# Altium PCB PCB.PcbDoc
Units mm, origin at the board's own origin, x right, y up, seen from the top; angles counter-clockwise.
Board outline 84 x 100 mm, 4 copper layers (Top Layer, Layer2, Layer3, Bottom Layer), stack 1.552 mm thick; 28 components, 24 nets, 161 pads, 1856 vias.
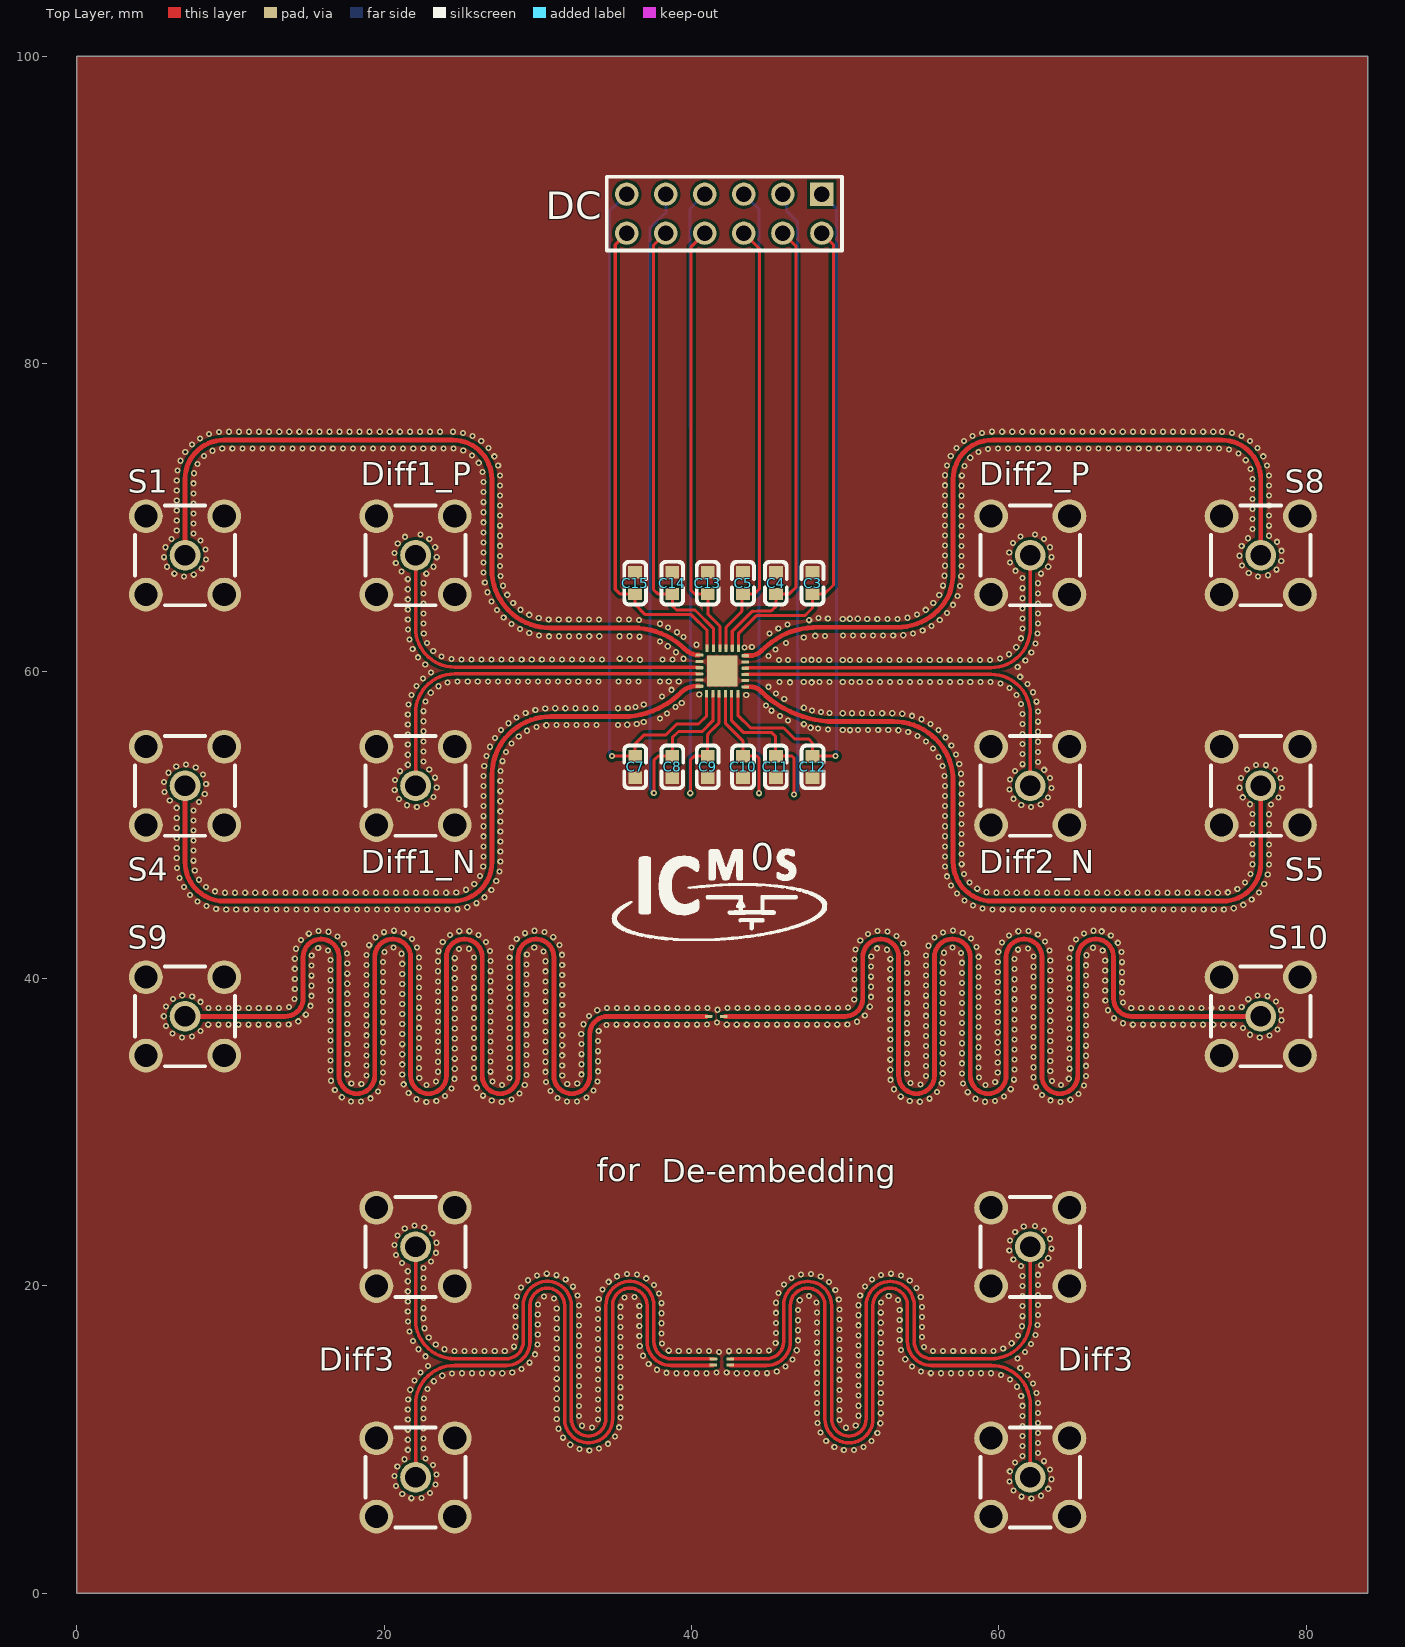
[diagram p0: Top Layer view]
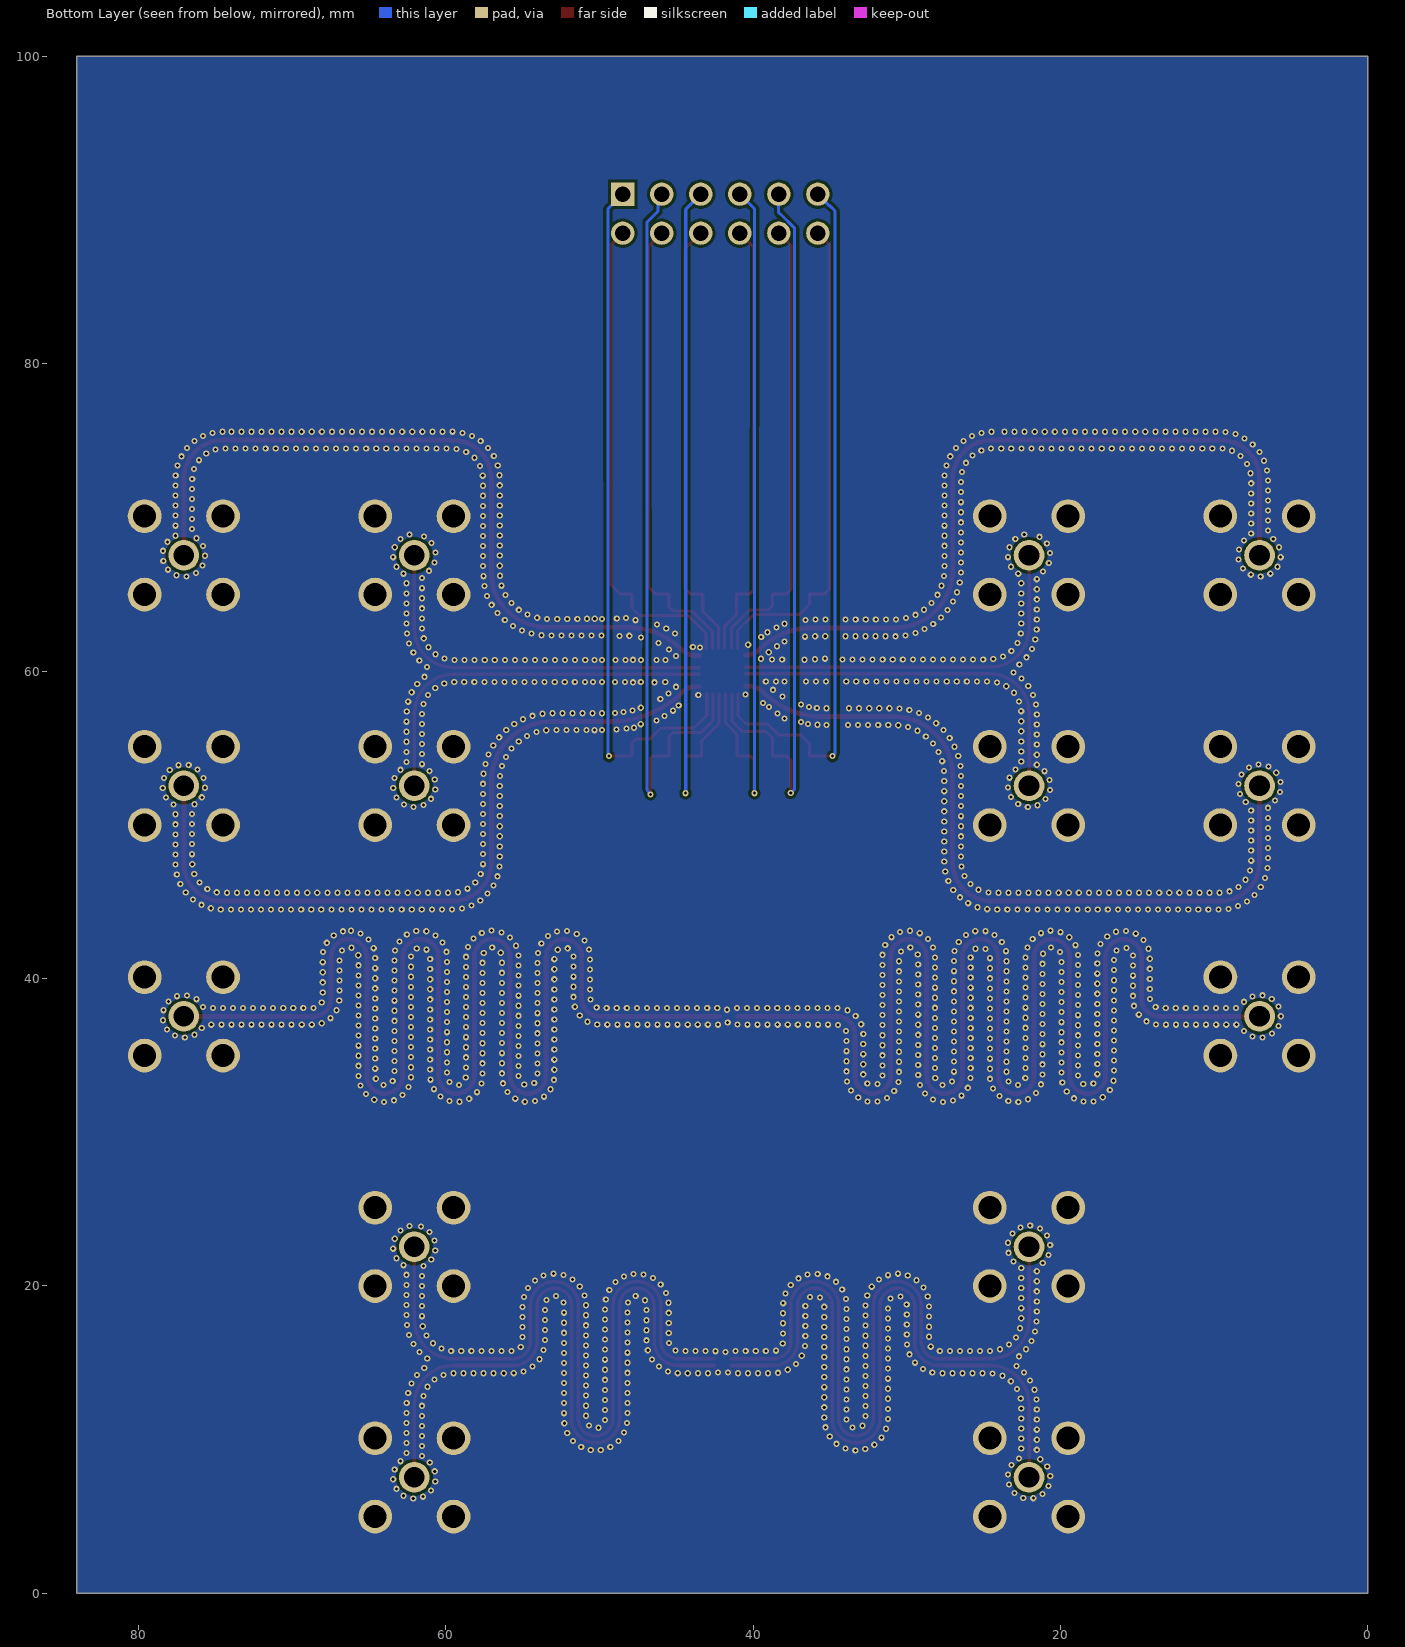
[diagram p1: Bottom Layer view, seen from below]
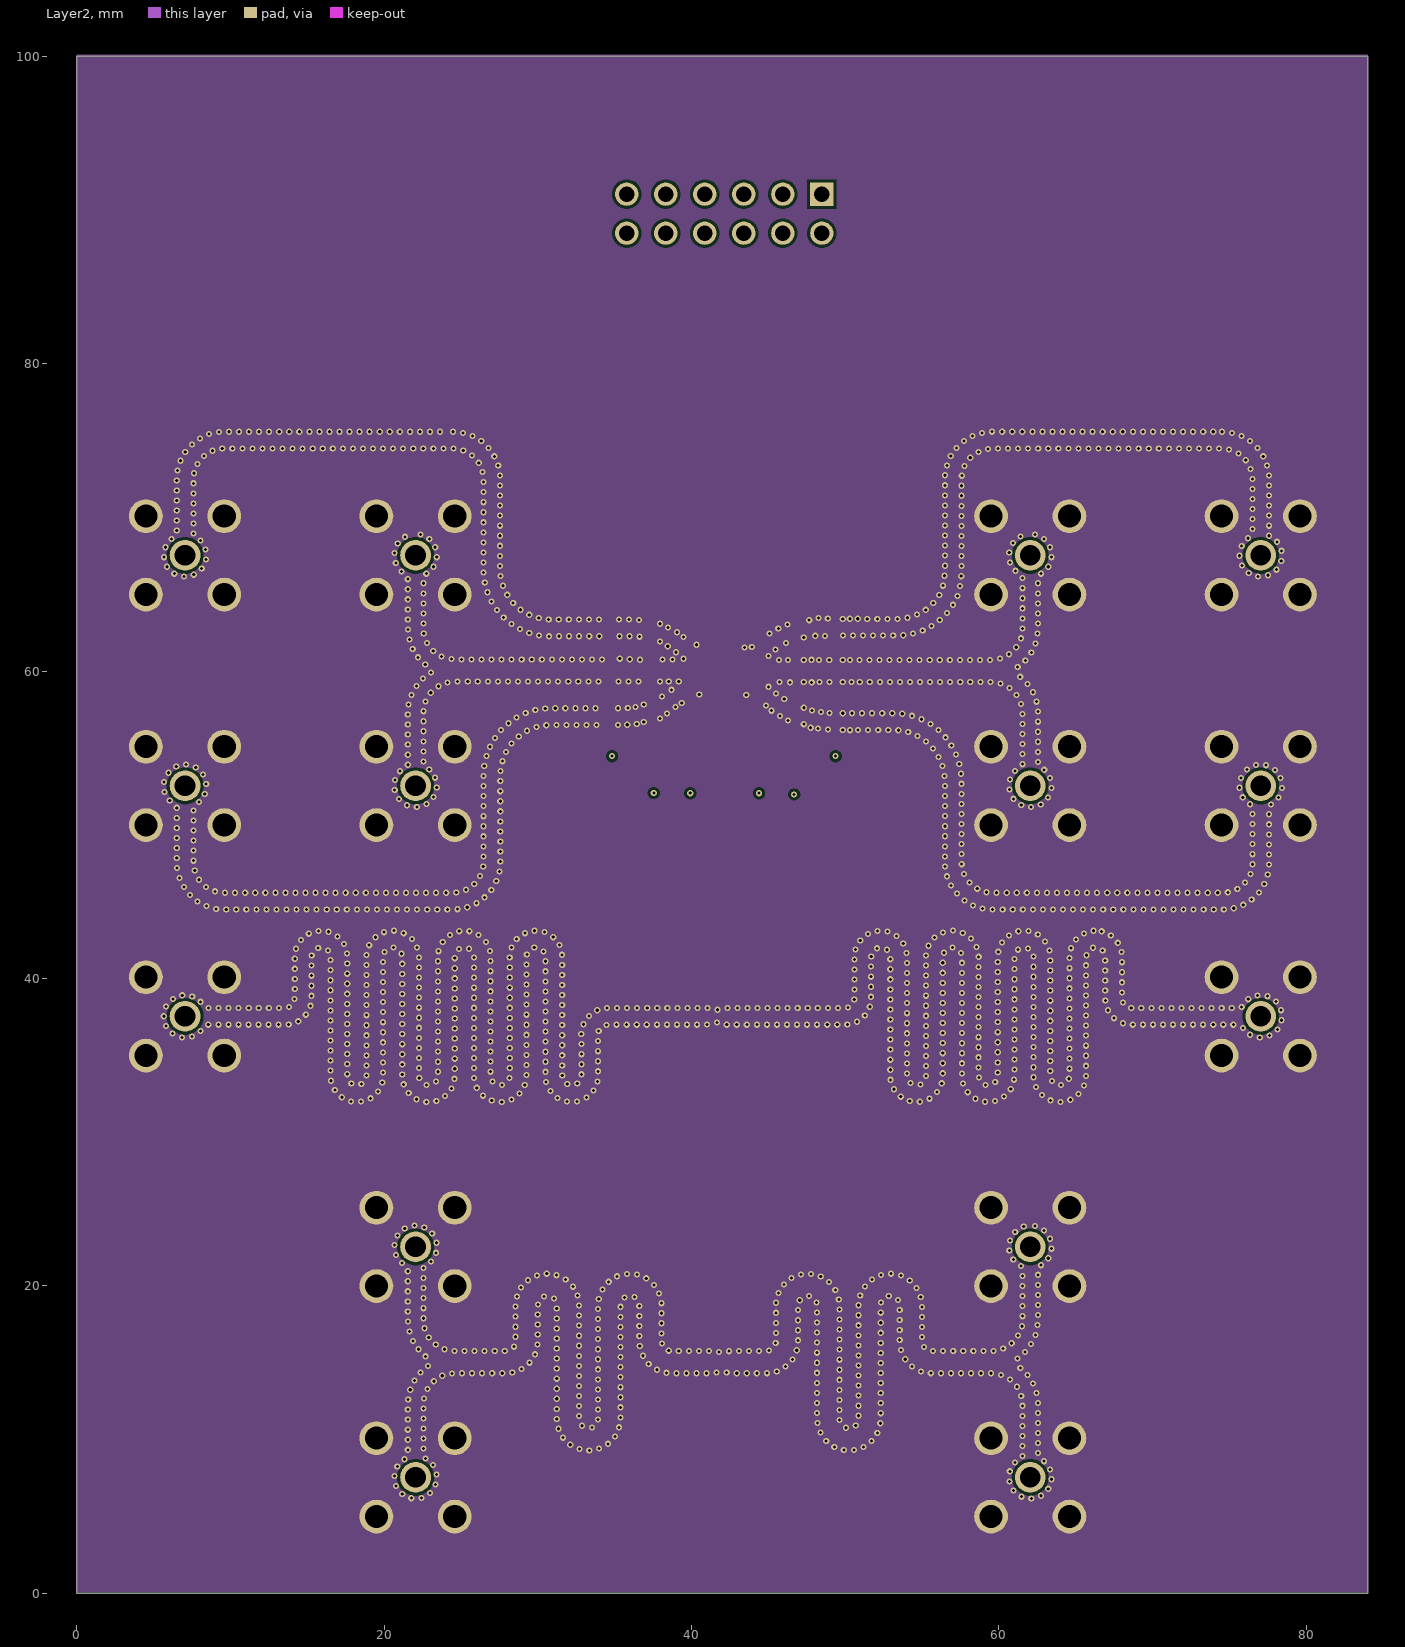
[diagram p2: Layer2]
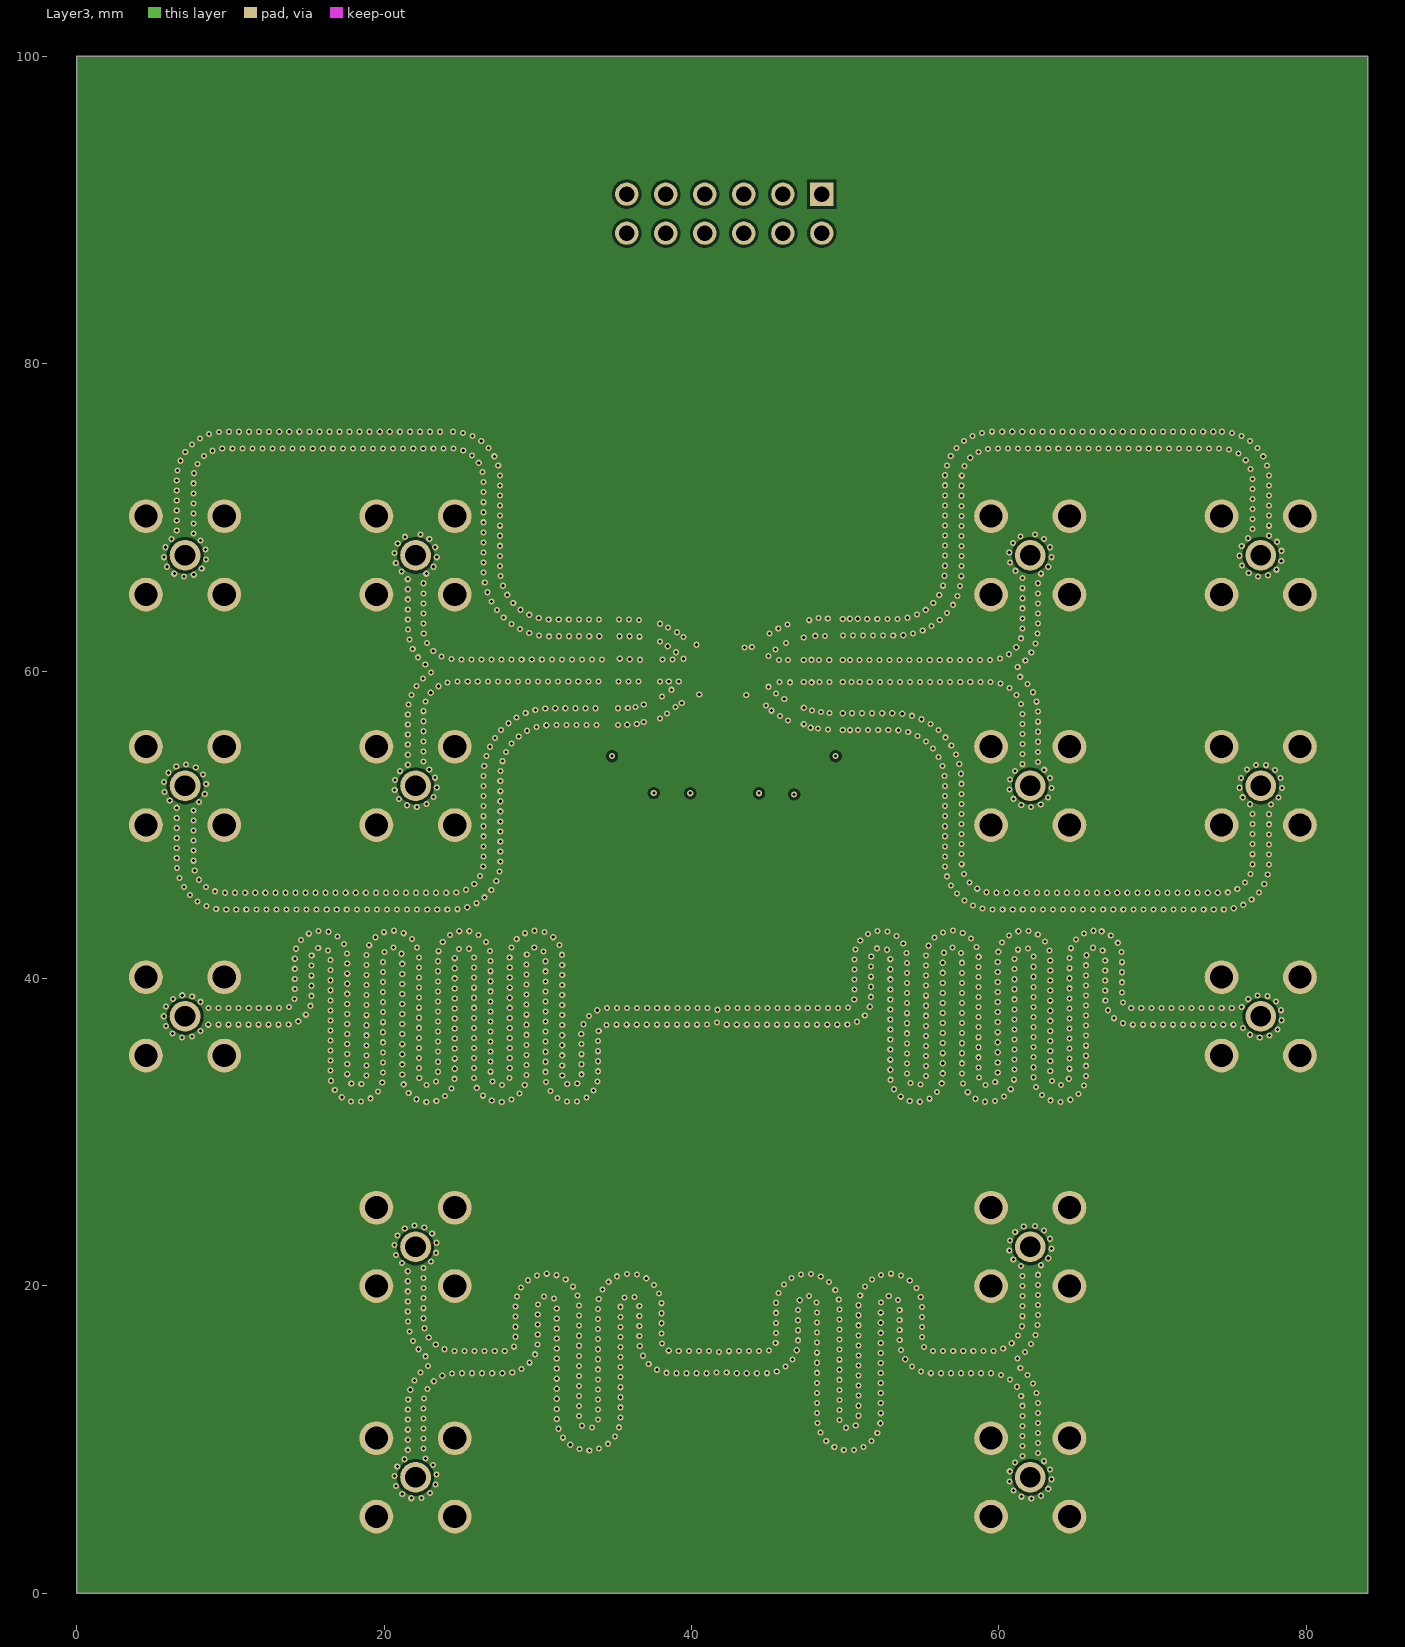
[diagram p3: Layer3]

## Layer stack, top to bottom
Top Solder: solder mask 0.035, Solder Resist, Dk 3.5
Top Layer: signal copper 0.035
Dielectric 2: prepreg 0.168, PP-006, Dk 4.1
Layer2: signal copper 0.018
Dielectric 1: dielectric 1.11, FR-4, Dk 4.8
Layer3: signal copper 0.018
Dielectric 3: prepreg 0.168, PP-006, Dk 4.1
Bottom Layer: signal copper 0.035
Bottom Solder: solder mask 0.035, Solder Resist, Dk 3.5

## Board outline
0,0 0,100 84,100 84,0

## Design rules (kind name [scope] priority, off if disabled: settings)
Clearance GND [InPolygon] p1: gap=0.185 ignorepadtopadclearanceinfootprint=FALSE
Clearance [All] p2: gap=0.1 ignorepadtopadclearanceinfootprint=FALSE
DiffPairsRouting [InDifferentialPairClass('All Differential Pairs')] p1: maxlimit=100 minlimit=0.21 mostfreqgap=0.21 toplayer_minwidth=0.01 toplayer_maxwidth=0.23 toplayer_prefwidth=0.23 midlayer1_minwidth=0.01 midlayer1_maxwidth=0.23 midlayer1_prefwidth=0.23 midlayer2_minwidth=0.01 midlayer2_maxwidth=0.23 midlayer2_prefwidth=0.23 bottomlayer_minwidth=0.01 bottomlayer_maxwidth=0.23 bottomlayer_prefwidth=0.23 maxuncoupledlength=12.7
MinimumSolderMaskSliver [All] p1: minsoldermaskwidth=0.1
PolygonConnect [InNet('GND')] p1: connectstyle=Direct reliefconductorwidth=0.254 reliefentries=4 polygonreliefangle="90 Angle" airgapwidth=0.254
RoutingVias [All] p1: holewidth=0.2 width=0.4 viastyle="Through Hole" minholewidth=0.2 minwidth=0.4 maxholewidth=0.6 maxwidth=1.2
SilkToSolderMaskClearance [IsPad] p1: minsilkscreentomaskgap=0.1 clearancetoexposedcopper=TRUE
SolderMaskExpansion [All] p1: expansion=0.102 istentingtop=FALSE
SupplyNets "Schematic Supply Nets" [InNet('GND')] p1: voltage=0.000
Width RF [InNetClass('RF')] p1: maxlimit=0.315 minlimit=0.001 preferedwidth=0.315
Width [All] p2: maxlimit=0.315 minlimit=0.001 preferedwidth=0.315
27 further rules are at their usual default settings.

## Classes and differential pairs
net class RF: NetS9_5 RF1 RF2 RF3 RF4
component class sheet1: C3 C4 C5 C7 C8 C9 C10 C11 C12 C13 C14 C15 Diff1_N Diff1_P S1 S4 S5 S8 S9 S10 U1
differential pair RF3: +RF3_P -RF3_N
differential pair RF2: +RF2_P -RF2_N
differential pair RF1: +RF1_P -RF1_N

## Components (designator, comment, footprint, x,y, rotation, side; value= is the part's Value field where it differs from the comment)
C3 "C0603" C0603 47.876,65.733 r90 top
C4 "C0603" C0603 45.484,65.733 r90 top
C5 "C0603" C0603 43.353,65.733 r90 top
C7 "C0603" C0603 36.33,53.773 r90 top
C8 "C0603" C0603 38.746,53.773 r90 top
C9 "C0603" C0603 41.049,53.773 r90 top
C10 "C0603" C0603 43.353,53.773 r90 top
C11 "C0603" C0603 45.484,53.773 r90 top
C12 "C0603" C0603 47.876,53.773 r90 top
C13 "C0603" C0603 41.049,65.713 r270 top
C14 "C0603" C0603 38.746,65.713 r270 top
C15 "C0603" C0603 36.33,65.713 r270 top
De-embedding "BWSMA" BWSMA#1 62.04,7.533 r0 top (schematic designator S14)
Diff1_N "BWSMA" BWSMA#1 22.04,52.533 r0 top (schematic designator S3)
Diff1_P "BWSMA" BWSMA#1 22.04,67.533 r0 top (schematic designator S2)
Diff2_N "BWSMA" BWSMA#1 62.04,52.533 r0 top (schematic designator S6)
Diff2_P "BWSMA" BWSMA#1 62.04,67.533 r0 top (schematic designator S7)
Diff3 "BWSMA" BWSMA#1 62.04,22.533 r0 top (schematic designator S12)
Diff3 "BWSMA" BWSMA#1 22.04,22.533 r0 top (schematic designator S11)
for "BWSMA" BWSMA#1 22.04,7.533 r0 top (schematic designator S13)
S1 "BWSMA" BWSMA#1 7.04,67.533 r0 top
S4 "BWSMA" BWSMA#1 7.04,52.533 r0 top
S5 "BWSMA" BWSMA#1 77.04,52.533 r0 top
S8 "BWSMA" BWSMA#2 77.04,67.533 r0 top
S9 "BWSMA" BWSMA#1 7.04,37.533 r0 top
S10 "BWSMA" BWSMA#1 77.04,37.533 r0 top
U1 "2mm_24p" 2MM_8AC_16DC 45.043,60.004 r0 top
U2 "HX PZ2.54-2x6P ZZ" 2*6 42.547,89.713 r180 top

## Footprints (in the part's own frame and the unit in brackets; to place one, negate y for a bottom-side part, rotate by r counter-clockwise, add the part's x,y. Pads: shape width x height; smd on the part's side, far side on the other; paste and mask are expansions set on the pad)
2*6 [mm]
  rect 1.52x1.52 hole 1.02 paste-2539.97 mask+0.05: 1(-5.933,-1.327)
  round 1.52 hole 1.02 paste-2539.97 mask+0.05: 2(-5.933,1.213) 3(-3.393,-1.327) 4(-3.393,1.213) 5(-0.853,-1.327) 6(-0.853,1.213) 7(1.687,-1.327) 8(1.687,1.213) 9(4.227,-1.327) 10(4.227,1.213) 11(6.767,-1.327) 12(6.767,1.213)
  silkscreen extent -7.23,-2.46 8.07,2.34, body extent -7.2,-5.5 8.12,5.46, height 10.54
2MM_8AC_16DC [mm]
  rrect50% 0.5x0.2 smd mask+0.05: 1(-4.53,1.03) 2(-4.53,0.614) 3(-4.53,0.214) 4(-4.53,-0.186) 5(-4.53,-0.586) 6(-4.53,-0.99) 13(-1.539,-1.029) 14(-1.543,-0.618) 15(-1.543,-0.218) 16(-1.543,0.182) 17(-1.543,0.583) 18(-1.543,0.995)
  rect 0.1x0.05 on Mech16 mask+0.102: 1(-3.935,0.706) 2(-3.933,0.406) 3(-3.933,0.056) 4(-3.933,-0.044) 5(-3.933,-0.394) 6(-3.933,-0.694) 13(-2.133,-0.694) 14(-2.133,-0.394) 15(-2.133,-0.044) 16(-2.133,0.056) 17(-2.133,0.406) 18(-2.133,0.706)
  rrect50% 0.2x0.5 smd mask+0.05: 7(-4.062,-1.475) 8(-3.661,-1.475) 9(-3.256,-1.475) 10(-2.842,-1.475) 11(-2.431,-1.475) 12(-2.029,-1.475) 19(-1.996,1.483) 20(-2.396,1.483) 21(-2.796,1.483) 22(-3.196,1.483) 23(-3.628,1.483) 24(-4.032,1.483)
  rect 0.05x0.1 on Mech16 mask+0.102: 7(-3.733,-0.894) 8(-3.433,-0.894) 9(-3.083,-0.894) 10(-2.983,-0.894) 11(-2.633,-0.894) 12(-2.333,-0.894) 19(-2.333,0.906) 20(-2.633,0.906) 21(-2.983,0.906) 22(-3.083,0.906) 23(-3.433,0.906) 24(-3.733,0.906)
  rect 2x2 smd mask+0.05: 25(-3.049,0)
  body extent -4.03,-0.99 -2.03,1.01, height 0.05
BWSMA#1 [mm]
  round 2.2 hole 1.5 paste-2539.97 mask+0.051: 1(-2.55,-2.55) 2(-2.55,2.55) 3(2.55,2.55)
  round 2.2 hole 1.5 copper offset 0,0 paste-2539.97 mask+0.051: 4(2.55,-2.55)
  round 2 hole 1.35 paste-2539.97 mask+0.051: 5(0,0)
  silkscreen extent -3.25,-3.25 3.25,3.25, body extent -2.54,-2.5 2.46,2.5, height 8
BWSMA#2 [mm]
  round 2.2 hole 1.5 paste-2539.97 mask+0.051: 1(-2.55,-2.55) 2(-2.55,2.55) 3(2.55,2.55)
  round 2.2 hole 1.5 copper offset 0,0 paste-2539.97 mask+0.051: 4(2.55,-2.55)
  round 2 hole 1.35 paste-2539.97 mask+0.102: 5(0,0)
  silkscreen extent -3.25,-3.25 3.25,3.25, body extent -2.54,-2.5 2.46,2.5, height 8
C0603 [mm]
  rect 0.8x0.9 smd: 1(-0.71,0) 2(0.69,0)
  silkscreen extent -1.4,-0.71 1.38,0.71, body extent -0.82,-0.4 0.78,0.4, height 0.5

## Part data
U2: Color=Black, Current Rating=3A, JLCPCB Part Class="Extended Part", LCSC Part Name="2x6P 间距:2.54mm 方针 直插", Manufacturer=hanxia(韩下), Operating Temperature=-40℃~+105℃, Voltage Rating (Max)=-, Add into BOM=yes, Circluar Pins/Square Pins=Policy, Contact Material=Brass, Contact Plating=Gold, Convert to PCB=yes, Datasheet=https://atta.szlcsc.com/upload/public/pdf/source/20240723/7CFD6BBE81D942E4FB6053E60626E655.pdf, Device="HX PZ2.54-2x6P ZZ", Insulation Height=2.5mm, Length of End Connection Pin=3mm, Length of Mating Pin=6mm, Manufacturer Part="HX PZ2.54-2x6P ZZ", Mounting Type=Straight, Number of Pins=12P, Number of Rows="Double Row", Pin Structure=2x6P, Pitch=2.54mm, Row Spacing=2.54mm, Supplier=LCSC, Supplier Footprint=插件,P=2.54mm, Supplier Part=C32713279, Symbol="HX PZ2.54-2X6P ZZ"

## Free pads (board coordinates)
  rrect50% 0.5x0.2 smd mask+0.05: 2(41.111,37.531) 3(42.089,37.535) 4(41.422,15.241) 4(42.508,15.238) 4(42.519,14.838) 5(41.407,14.838)

## Via types
v1: diameter 0.4, hole 0.2, Top Layer to Bottom Layer, tented both sides, 1856 vias

## Nets (pads, with @x,y where several pads share a name; then routed paths per layer and width w, separated by ;. In a path a pad name is that pad's centre, name@x,y a point inside that pad or via, vN(x,y) a via of type N, cw(c..) or ccw(c..) an arc to the next point about the centre after c; other vN are vias at no path point)
DC3: C7.2 U1.7 U2.11 | length 46.3
  Top Layer w0.2: v1@34.825,54.464 C7.2 36.33,55.27 36.914,55.854 38.334,55.854 39.034,56.554 40.454,56.554 40.981,57.081 U1.7@40.981,58.529
  Bottom Layer w0.2: v1(34.824,54.464) 34.718,54.571 cw(c34.859,54.712) 34.659,54.712 34.659,89.859 cw(c34.859,89.859) 34.718,90 35.008,90.29 35.03,90.29 U2.11
DC4: C8.2 U1.8 U2.9 | length 49
  Top Layer w0.2: v1(37.544,52.064) 37.544,54.194 37.814,54.464 C8.2 38.746,55.676 39.144,56.074 40.694,56.074 41.382,56.762 U1.8@41.382,58.529
  Bottom Layer w0.2: v1(37.544,52.064) 37.348,52.26 cw(c37.489,52.402) 37.289,52.402 37.289,88.744 cw(c37.489,88.744) 37.348,88.886 38.176,89.714 38.217,89.714 38.334,89.831 38.334,91.026 U2.9
DC5: C9.2 U1.9 U2.7 | length 47.1
  Top Layer w0.2: v1(39.914,52.054) 39.924,52.064 39.924,54.214 40.174,54.464 C9.2 41.049,55.806 cw(c41.249,55.806) 41.108,55.947 41.729,56.568 ccw(c41.587,56.709) 41.787,56.709 U1.9@41.787,58.529
  Bottom Layer w0.2: v1(39.914,52.054) 39.914,56.11 cw(c40.114,56.11) 39.915,56.132 39.916,56.143 ccw(c39.718,56.166) 39.918,56.166 39.918,60.708 ccw(c39.718,60.708) 39.914,60.746 39.914,61.875 cw(c40.114,61.875) 39.914,61.887 39.917,61.937 ccw(c39.718,61.949) 39.918,61.948 39.918,75.811 ccw(c39.718,75.811) 39.9,75.892 39.9,90.08 U2.7
DC6: C10.2 U1.10 U2.5 | length 47.3
  Top Layer w0.2: U1.10@42.201,58.529 42.201,56.68 ccw(c42.401,56.68) 42.259,56.539 43.295,55.503 cw(c43.153,55.362) 43.353,55.362 C10.2 44.255,54.463 44.394,54.324 v1(44.394,52.054)
  Bottom Layer w0.2: U2.5 44.32,90.12 cw(c44.178,89.979) 44.378,89.979 44.378,52.13 ccw(c44.578,52.131) v1(44.394,52.054)
DC7: C11.2 U1.11 U2.3 | length 49.5
  Top Layer w0.2: U1.11@42.611,58.529 42.611,56.777 43.394,55.994 45.224,55.994 45.474,55.744 45.474,54.474 C11.2 46.535,54.463 46.674,54.324 v1(46.674,51.974)
  Bottom Layer w0.2: U2.3 46.184,90.796 46.184,89.934 46.9,89.218 46.9,70.595 ccw(c47.091,70.537) 46.891,70.539 46.909,52.429 cw(c46.383,52.428) 46.755,52.056 v1(46.674,51.974)
DC8: C12.2 U1.12 U2.1 | length 46.4
  Top Layer w0.2: U1.12@43.014,58.529 43.014,57.124 43.844,56.294 45.994,56.294 46.694,55.594 47.604,55.594 47.876,55.322 C12.2 v1(49.374,54.464) v1@49.384,54.454
  Bottom Layer w0.2: U2.1 49.44,90.08 49.44,72.351 ccw(c49.638,72.324) 49.438,72.325 49.438,54.611 cw(c49.238,54.611) 49.38,54.47 v1(49.374,54.464)
DC11: C3.1 U1.19 U2.2 | length 32.2
  Top Layer w0.2: U1.19@43.047,61.487 43.047,62.426 44.186,63.565 cw(c44.327,63.424) 44.327,63.624 47.311,63.624 ccw(c47.311,63.824) 47.453,63.682 47.876,64.105 C3.1 48.653,65.023 49.234,65.604 49.234,87.746 U2.2
DC12: C4.1 U1.20 U2.4 | length 30.3
  Top Layer w0.2: U1.20@42.647,61.487 42.647,62.596 43.886,63.835 cw(c44.027,63.694) 44.005,63.892 44.274,63.921 cw(c44.327,63.424) 44.327,63.924 45.131,63.924 ccw(c45.131,64.124) 45.273,63.982 45.484,64.194 C4.1 46.363,65.023 46.794,65.454 46.794,87.646 U2.4
DC13: C5.1 U1.21 U2.6 | length 28.8
  Top Layer w0.2: U1.21@42.247,61.487 42.247,62.784 cw(c42.447,62.784) 42.305,62.925 43.216,63.836 ccw(c43.074,63.977) 43.274,63.977 43.274,64.944 C5.1 44.093,65.023 44.424,65.354 44.424,87.476 U2.6
DC14: C13.2 U1.22 U2.8 | length 28.7
  Top Layer w0.2: U2.8 39.977,87.617 39.977,65.241 40.195,65.023 C13.2 41.064,65.009 41.064,63.694 41.847,62.911 U1.22@41.847,61.487
DC15: C14.2 U1.23 U2.10 | length 30.2
  Top Layer w0.2: U2.10 37.524,87.704 37.524,65.304 37.805,65.023 C14.2 38.746,64.242 39.014,63.974 40.224,63.974 41.415,62.783 U1.23@41.415,61.487
DC16: C15.2 U1.24 U2.12 | length 32.1
  Top Layer w0.2: U2.12 35.78,88.493 35.034,87.747 35.034,65.324 35.335,65.023 C15.2 ; C15.2 36.33,64.333 36.989,63.674 39.974,63.674 41.011,62.637 U1.24@41.011,61.487
GND: C3.2 C4.2 C5.2 C7.1 C8.1 C9.1 C10.1 C11.1 C12.1 C13.1 C14.1 C15.1 De-embedding.1 De-embedding.2 De-embedding.3 De-embedding.4 Diff1_N.1 Diff1_N.2 Diff1_N.3 Diff1_N.4 Diff1_P.1 Diff1_P.2 Diff1_P.3 Diff1_P.4 Diff2_N.1 Diff2_N.2 Diff2_N.3 Diff2_N.4 Diff2_P.1 Diff2_P.2 Diff2_P.3 Diff2_P.4 Diff3.1 Diff3.2 Diff3.3 Diff3.4 for.1 for.2 for.3 for.4 S1.1 S1.2 S1.3 S1.4 S4.1 S4.2 S4.3 S4.4 S5.1 S5.2 S5.3 S5.4 S8.1 S8.2 S8.3 S8.4 S9.1 S9.2 S9.3 S9.4 S10.1 S10.2 S10.3 S10.4 U1.2 U1.5 U1.14 U1.17 U1.25
  other v1: 62.11,6.149 21.762,6.176 22.415,6.2 61.468,6.274 62.736,6.337 21.172,6.458 22.986,6.519 60.954,6.679 63.209,6.788 20.775,6.977 23.342,7.068 60.681,7.273 63.417,7.409 20.658,7.621 23.408,7.718 60.71,7.926 63.318,8.055 20.852,8.245 23.171,8.328 61.039,8.491 62.936,8.586 21.31,8.712 22.682,8.762 61.534,8.919 62.545,9.11 33.345,9.279 21.534,9.327 49.907,9.307 50.561,9.306 32.698,9.373 22.545,9.401 33.988,9.402 49.288,9.518 51.182,9.512 61.534,9.573 32.108,9.655 34.561,9.718 62.545,9.764 48.76,9.904 51.711,9.896 21.534,9.981 22.545,10.055 31.642,10.113 35.008,10.194 61.534,10.227 62.545,10.418 48.388,10.442 52.088,10.43 21.534,10.635 31.341,10.694 22.545,10.709 33.516,10.77 50.046,10.76 35.28,10.789 32.874,10.894 61.534,10.881 50.683,10.911 52.282,11.055 48.199,11.068 62.545,11.072 49.632,11.266 21.534,11.289 33.909,11.294 31.228,11.338 22.545,11.363 35.365,11.438 32.679,11.518 61.534,11.535 50.858,11.541 52.31,11.708 48.172,11.722 62.545,11.726 49.624,11.92 21.534,11.943 33.913,11.948 31.227,11.992 22.545,12.017 35.365,12.092 32.679,12.172 50.858,12.195 61.534,12.189 48.172,12.376 52.31,12.362 62.537,12.38 49.624,12.574 21.559,12.596 33.913,12.602 31.227,12.646 22.578,12.671 35.365,12.746 32.679,12.826 50.858,12.849 61.45,12.838 48.172,13.03 52.31,13.016 62.441,13.027 21.693,13.236 49.624,13.228 33.913,13.256 22.815,13.28 31.227,13.3 35.365,13.4 61.176,13.432 32.679,13.48 50.858,13.503 62.216,13.641 52.31,13.67 48.172,13.684 23.226,13.789 21.972,13.828 49.624,13.882 60.719,13.899 33.913,13.91 31.227,13.954 35.365,14.054 23.774,14.145 32.679,14.134 50.858,14.157 60.139,14.201 61.857,14.188 24.411,14.297 25.064,14.307 25.718,14.307 26.372,14.307 27.026,14.307 27.68,14.307 39.018,14.307 39.672,14.307 40.326,14.307 40.98,14.307 42.938,14.307 43.592,14.307 44.246,14.307 56.223,14.307 56.877,14.307 57.531,14.307 58.185,14.307 58.839,14.307 59.493,14.307 44.9,14.311 52.31,14.324 55.569,14.311 22.363,14.352 28.333,14.354 38.365,14.336 41.632,14.358 42.286,14.359 48.172,14.338 45.544,14.428 54.927,14.432 37.742,14.536 49.624,14.536 28.944,14.586 33.913,14.564 31.227,14.608 61.393,14.649 35.365,14.708 46.12,14.738 54.353,14.746 22.858,14.779 32.679,14.788 50.858,14.811 37.211,14.917 48.172,14.992 52.31,14.978 29.455,14.995 49.624,15.19 33.913,15.218 46.573,15.21 53.904,15.221 31.227,15.262 61.2,15.274 35.365,15.362 22.692,15.412 32.679,15.442 36.829,15.448 50.858,15.465 29.813,15.542 48.172,15.646 52.31,15.632 41.781,15.692 61.701,15.695 42.433,15.744 24.575,15.758 25.229,15.759 25.883,15.759 26.537,15.759 27.191,15.759 27.845,15.759 38.514,15.777 39.168,15.759 39.822,15.759 40.476,15.759 41.13,15.759 43.086,15.759 43.74,15.759 44.394,15.759 55.717,15.759 56.371,15.759 57.025,15.759 57.679,15.759 58.333,15.759 58.987,15.759 59.641,15.766 45.048,15.785 46.847,15.803 53.631,15.815 49.624,15.844 22.227,15.872 23.93,15.867 33.913,15.872 60.28,15.907 31.227,15.916 28.437,16.036 35.365,16.016 55.116,16.015 36.629,16.07 32.679,16.096 50.858,16.119 23.352,16.173 29.974,16.176 62.095,16.216 38.065,16.252 60.832,16.258 45.476,16.28 52.31,16.286 48.172,16.3 21.868,16.418 46.938,16.451 53.544,16.464 49.624,16.498 33.913,16.526 31.227,16.57 22.896,16.642 35.365,16.67 54.996,16.658 28.541,16.682 36.599,16.724 32.679,16.75 50.858,16.773 61.251,16.76 62.377,16.806 29.993,16.83 38.051,16.906 45.486,16.934 52.31,16.94 48.172,16.954 21.64,17.031 46.938,17.105 53.544,17.118 49.624,17.152 33.913,17.18 31.227,17.224 22.626,17.237 35.365,17.324 54.996,17.312 28.541,17.336 36.599,17.378 61.493,17.368 32.679,17.404 50.858,17.427 62.518,17.445 29.993,17.484 38.051,17.56 45.486,17.588 48.172,17.608 52.31,17.594 21.543,17.678 46.938,17.759 53.544,17.772 49.624,17.806 33.913,17.834 22.545,17.887 31.227,17.878 54.996,17.966 28.541,17.99 35.365,17.978 36.599,18.032 61.534,18.021 32.679,18.058 50.858,18.081 62.545,18.098 29.993,18.138 38.051,18.214 45.486,18.242 48.172,18.262 52.31,18.248 21.534,18.332 46.938,18.413 53.544,18.426 49.624,18.46 33.913,18.488 22.545,18.541 31.227,18.532 54.996,18.62 28.541,18.644 35.365,18.632 61.534,18.675 36.599,18.686 32.679,18.712 50.861,18.735 62.545,18.752 30,18.792 38.037,18.868 45.503,18.896 52.337,18.902 48.14,18.915 21.534,18.986 47.04,19.059 53.434,19.07 49.581,19.112 33.961,19.14 31.046,19.161 22.545,19.195 35.633,19.228 36.286,19.26 54.913,19.269 28.631,19.292 30.408,19.303 47.635,19.33 52.833,19.329 61.534,19.329 32.569,19.357 50.974,19.379 62.545,19.406 37.89,19.505 45.656,19.531 21.534,19.64 49.354,19.726 34.197,19.75 22.545,19.849 54.644,19.865 28.905,19.885 32.274,19.94 51.278,19.958 61.534,19.983 37.547,20.061 62.545,20.06 46.008,20.083 48.95,20.241 34.608,20.258 21.534,20.294 54.198,20.343 29.357,20.358 31.81,20.401 51.745,20.416 22.545,20.503 37.049,20.486 46.512,20.499 48.406,20.602 35.156,20.615 61.534,20.637 29.933,20.668 53.626,20.662 31.222,20.688 52.337,20.695 36.444,20.734 62.545,20.714 47.12,20.741 35.791,20.772 47.773,20.77 52.984,20.785 30.576,20.787 21.534,20.948 22.545,21.157 61.444,21.284 62.74,21.339 21.148,21.476 23.045,21.578 60.938,21.699 63.212,21.791 20.763,22.004 23.37,22.146 60.677,22.299 63.417,22.412 20.662,22.651 23.398,22.799 60.718,22.952 63.317,23.059 20.866,23.272 23.121,23.392 61.059,23.509 62.933,23.588 21.337,23.725 22.605,23.794 61.616,23.852 62.35,23.885 21.963,23.916 27.646,31.959 64.01,31.954 18.489,31.981 22.737,31.965 31.895,31.987 54.852,31.975 59.094,31.975 17.835,31.996 32.549,31.991 23.388,32.03 54.2,32.015 59.746,32.016 26.998,32.046 63.366,32.069 64.647,32.105 28.279,32.125 22.108,32.141 55.476,32.174 58.47,32.171 19.105,32.2 31.285,32.223 33.152,32.243 17.24,32.268 53.614,32.305 60.331,32.309 23.961,32.345 26.43,32.371 62.806,32.406 65.188,32.472 28.806,32.511 21.593,32.544 55.97,32.601 57.974,32.597 19.585,32.644 30.815,32.678 33.616,32.704 16.784,32.736 53.171,32.787 60.772,32.792 24.384,32.844 26.023,32.882 62.422,32.935 65.541,33.022 22.751,33.063 27.669,33.062 29.143,33.072 59.131,33.073 64.044,33.058 54.887,33.105 18.51,33.12 21.266,33.111 31.91,33.123 17.857,33.169 32.563,33.165 56.281,33.177 57.662,33.172 54.24,33.199 19.873,33.231 59.759,33.254 30.538,33.27 23.366,33.287 27.056,33.291 33.877,33.303 63.449,33.329 16.543,33.344 52.955,33.404 60.987,33.41 24.575,33.469 64.548,33.474 22.282,33.518 25.845,33.512 28.143,33.512 58.696,33.561 62.257,33.568 55.256,33.645 65.678,33.662 18.841,33.684 31.583,33.689 29.251,33.717 21.174,33.758 32.829,33.762 17.596,33.768 54.016,33.813 56.347,33.828 57.594,33.822 19.927,33.883 59.925,33.887 23.505,33.926 26.92,33.931 30.498,33.923 33.913,33.956 63.34,33.974 16.512,33.998 52.932,34.058 61.009,34.063 24.589,34.123 64.587,34.127 22.258,34.171 25.836,34.166 28.167,34.166 58.678,34.215 62.256,34.222 55.263,34.299 65.671,34.316 18.843,34.338 31.582,34.343 29.251,34.371 17.596,34.422 21.174,34.412 32.829,34.416 54.016,34.467 57.594,34.476 56.347,34.482 19.927,34.537 59.925,34.541 30.498,34.577 23.505,34.58 26.92,34.585 33.913,34.61 63.34,34.628 16.512,34.652 52.932,34.712 61.009,34.717 24.589,34.777 64.587,34.781 22.258,34.825 25.836,34.82 28.167,34.82 58.678,34.869 62.256,34.876 55.263,34.953 65.671,34.97 18.843,34.992 31.582,34.997 29.251,35.025 17.596,35.076 21.174,35.066 32.829,35.07 54.016,35.121 56.347,35.136 57.594,35.13 19.927,35.191 59.925,35.195 23.505,35.234 30.498,35.231 26.92,35.239 33.913,35.264 63.34,35.282 16.512,35.306 52.932,35.366 61.009,35.371 24.589,35.431 64.587,35.435 22.258,35.479 25.836,35.474 28.167,35.474 58.678,35.523 62.256,35.53 55.263,35.607 65.671,35.624 18.843,35.646 31.582,35.651 29.251,35.679 21.174,35.72 17.596,35.73 32.829,35.724 54.016,35.775 56.347,35.79 57.594,35.784 19.927,35.845 59.925,35.849 23.505,35.888 26.92,35.893 30.498,35.885 33.913,35.918 63.34,35.936 16.512,35.96 52.932,36.02 61.009,36.025 24.589,36.085 64.587,36.089 25.836,36.128 22.258,36.133 28.167,36.128 76.977,36.148 6.841,36.166 58.678,36.177 62.256,36.184 7.492,36.225 55.263,36.261 65.671,36.278 77.618,36.277 18.843,36.3 31.582,36.305 29.251,36.333 76.35,36.334 21.174,36.374 32.823,36.378 17.596,36.384 6.234,36.41 54.016,36.429 56.347,36.444 57.594,36.438 19.927,36.499 59.925,36.503 23.505,36.542 26.92,36.547 30.498,36.539 8.043,36.577 33.957,36.571 63.34,36.59 16.512,36.614 52.932,36.674 61.009,36.679 78.13,36.685 24.589,36.739 64.587,36.743 22.258,36.787 25.836,36.782 28.167,36.782 75.874,36.783 58.678,36.831 62.256,36.838 5.805,36.904 55.263,36.915 65.671,36.932 18.843,36.954 31.582,36.959 8.551,36.989 9.205,36.989 9.859,36.989 10.513,36.989 11.167,36.989 11.821,36.989 12.475,36.989 13.129,36.989 29.251,36.987 34.47,36.976 35.124,36.989 35.778,36.989 36.432,36.989 37.086,36.989 37.74,36.989 38.394,36.989 39.048,36.989 39.702,36.989 40.356,36.989 42.288,36.991 42.942,36.991 43.596,36.991 44.25,36.991 44.904,36.991 45.558,36.991 46.212,36.991 46.866,36.991 47.52,36.991 48.174,36.991 48.828,36.991 49.482,36.991 68.714,36.991 69.368,36.991 70.022,36.991 70.676,36.991 71.33,36.991 71.984,36.991 72.638,36.991 73.292,36.991 73.946,36.991 74.6,36.991 75.254,36.991 13.783,37.007 41.01,36.995 50.136,37 17.596,37.038 21.174,37.028 32.962,37.017 54.016,37.083 57.594,37.092 68.067,37.085 56.347,37.098 41.649,37.132 19.927,37.153 59.925,37.157 30.498,37.193 50.765,37.18 14.404,37.211 23.505,37.196 26.92,37.201 63.34,37.244 16.512,37.268 78.399,37.28 52.932,37.328 61.009,37.333 24.589,37.393 64.587,37.397 67.501,37.413 22.258,37.441 25.836,37.436 28.167,37.436 58.678,37.485 62.256,37.492 5.656,37.54 33.318,37.566 55.263,37.569 51.275,37.589 65.671,37.586 18.843,37.608 31.582,37.613 14.896,37.642 29.251,37.641 17.596,37.692 21.174,37.682 54.016,37.737 56.347,37.752 57.594,37.746 19.927,37.807 59.925,37.811 23.505,37.85 30.498,37.847 26.92,37.855 63.34,37.898 16.512,37.922 33.861,37.931 67.099,37.929 78.367,37.934 41.684,37.961 52.932,37.982 61.009,37.987 24.589,38.047 64.587,38.051 8.566,38.073 9.22,38.073 9.874,38.073 10.528,38.073 11.182,38.073 11.836,38.073 12.49,38.073 13.144,38.073 34.498,38.077 35.152,38.073 35.806,38.073 36.46,38.073 37.114,38.073 37.768,38.073 38.422,38.073 39.076,38.073 39.73,38.073 40.384,38.073 41.038,38.066 42.328,38.075 42.982,38.075 43.636,38.075 44.29,38.075 44.944,38.075 45.598,38.075 46.252,38.075 46.906,38.075 47.56,38.075 48.214,38.075 48.868,38.075 49.522,38.075 68.611,38.081 69.265,38.075 69.919,38.075 70.573,38.075 71.227,38.075 71.881,38.075 72.535,38.075 73.189,38.075 73.843,38.075 74.497,38.075 75.151,38.075 22.258,38.095 25.836,38.09 28.167,38.09 13.796,38.131 50.175,38.116 51.598,38.158 58.678,38.139 62.256,38.146 75.8,38.151 5.811,38.176 15.202,38.22 55.263,38.223 65.671,38.24 18.843,38.262 31.582,38.267 29.251,38.295 21.174,38.336 17.596,38.346 54.016,38.391 56.347,38.406 57.594,38.4 19.927,38.461 68.067,38.443 8.054,38.479 59.925,38.465 23.505,38.504 26.92,38.509 30.498,38.501 78.034,38.497 63.34,38.552 66.925,38.559 16.512,38.576 50.587,38.623 52.932,38.636 61.009,38.641 6.245,38.665 14.173,38.665 76.225,38.649 24.589,38.701 64.587,38.705 25.836,38.744 22.258,38.749 28.167,38.744 58.678,38.793 51.685,38.806 62.256,38.8 7.505,38.835 77.481,38.845 15.265,38.871 55.263,38.877 65.671,38.894 6.855,38.902 18.843,38.916 31.582,38.921 76.829,38.899 29.251,38.949 21.174,38.99 17.596,39 54.016,39.045 56.347,39.06 57.594,39.054 68.002,39.094 19.927,39.115 59.925,39.119 23.505,39.158 26.92,39.163 30.498,39.155 63.34,39.206 66.918,39.213 16.512,39.23 50.601,39.277 52.932,39.29 61.009,39.295 14.181,39.319 24.589,39.355 64.587,39.359 22.258,39.403 25.836,39.398 28.167,39.398 58.678,39.447 62.256,39.454 51.685,39.46 15.265,39.525 55.263,39.531 65.671,39.548 18.843,39.57 31.582,39.575 29.251,39.603 17.596,39.654 21.174,39.644 54.016,39.699 57.594,39.708 56.347,39.714 68.002,39.748 19.927,39.769 59.925,39.773 30.498,39.809 23.505,39.812 26.92,39.817 63.34,39.86 16.512,39.884 66.918,39.867 50.601,39.931 52.932,39.944 61.009,39.949 14.181,39.973 24.589,40.009 64.587,40.013 22.258,40.057 25.836,40.052 28.167,40.052 51.685,40.114 58.678,40.101 62.256,40.108 15.265,40.179 55.263,40.185 65.671,40.202 18.843,40.224 31.582,40.229 29.251,40.257 17.596,40.308 21.174,40.298 54.016,40.353 56.347,40.368 57.594,40.362 68.002,40.402 19.927,40.423 59.925,40.427 23.505,40.466 26.92,40.471 30.498,40.463 63.34,40.514 66.918,40.521 16.512,40.538 50.601,40.585 52.932,40.598 61.009,40.603 14.181,40.627 24.589,40.663 64.587,40.667 22.258,40.711 25.836,40.706 28.167,40.706 51.685,40.768 58.678,40.755 62.256,40.762 15.265,40.833 55.263,40.839 65.671,40.856 18.843,40.878 31.582,40.883 29.251,40.911 21.174,40.952 17.596,40.962 54.016,41.007 56.347,41.022 57.594,41.016 19.927,41.077 68.002,41.056 59.925,41.081 23.505,41.12 26.92,41.125 30.498,41.117 63.34,41.168 66.918,41.175 16.512,41.192 50.601,41.239 52.932,41.252 61.009,41.257 14.181,41.281 24.589,41.317 64.587,41.321 25.836,41.36 28.166,41.36 22.26,41.365 58.684,41.409 51.692,41.422 62.25,41.416 15.281,41.487 55.264,41.493 65.69,41.509 18.849,41.532 31.575,41.537 29.279,41.564 21.129,41.605 17.579,41.616 53.993,41.661 56.419,41.672 57.524,41.667 67.973,41.71 20.026,41.723 59.958,41.734 30.371,41.759 23.543,41.773 26.881,41.778 66.755,41.808 16.337,41.822 63.291,41.82 52.708,41.866 50.667,41.89 61.237,41.87 24.869,41.908 14.264,41.93 25.523,41.934 52.061,41.962 61.885,41.959 64.685,41.968 15.704,41.986 66.128,41.995 20.615,42.009 22.142,42.008 28.281,42.004 29.764,42.003 56.973,42.018 58.547,42.048 55.427,42.126 19.023,42.163 31.401,42.167 17.378,42.238 53.777,42.278 67.737,42.32 60.205,42.339 23.81,42.37 26.612,42.374 63.006,42.409 50.978,42.465 14.586,42.5 65.015,42.532 21.802,42.567 28.62,42.563 58.191,42.597 19.422,42.68 55.809,42.657 30.999,42.683 16.949,42.732 53.335,42.76 60.665,42.805 67.282,42.79 24.277,42.828 26.144,42.831 62.531,42.858 51.473,42.892 15.093,42.913 65.535,42.93 21.268,42.945 29.152,42.943 57.649,42.963 19.988,43.009 56.369,42.995 30.433,43.011 16.373,43.04 52.749,43.051 24.883,43.073 25.537,43.074 61.263,43.07 61.916,43.081 66.69,43.066 15.721,43.095 20.634,43.106 29.786,43.105 52.096,43.091 57.012,43.111 66.166,43.102 74.635,44.483 9.718,44.491 10.372,44.491 11.026,44.491 11.68,44.491 12.334,44.491 12.988,44.491 13.642,44.491 14.296,44.491 14.95,44.491 15.604,44.491 16.258,44.491 16.912,44.491 17.566,44.491 18.22,44.491 18.874,44.491 19.528,44.491 20.182,44.491 20.836,44.491 21.49,44.491 22.144,44.491 22.798,44.491 23.452,44.491 24.106,44.491 24.76,44.507 59.593,44.491 60.247,44.491 60.901,44.491 61.555,44.491 62.209,44.491 62.863,44.491 63.517,44.491 64.171,44.491 64.825,44.491 65.479,44.491 66.133,44.491 66.787,44.491 67.441,44.491 68.095,44.491 68.749,44.491 69.403,44.491 70.057,44.491 70.711,44.491 71.365,44.491 72.019,44.491 72.673,44.491 73.327,44.491 73.981,44.491 9.065,44.53 58.943,44.555 75.284,44.569 25.402,44.63 8.437,44.713 58.32,44.755 75.899,44.791 25.999,44.897 7.858,45.017 57.752,45.079 76.451,45.141 26.529,45.28 7.356,45.436 57.268,45.519 9.645,45.575 10.299,45.575 10.953,45.575 11.607,45.575 12.261,45.575 12.915,45.575 13.569,45.575 14.223,45.575 14.877,45.575 15.531,45.575 16.185,45.575 16.839,45.575 17.493,45.575 18.147,45.575 18.801,45.575 19.455,45.575 20.108,45.575 20.762,45.575 21.416,45.575 22.07,45.575 22.724,45.575 23.378,45.575 24.032,45.575 59.854,45.575 60.508,45.575 61.162,45.575 61.816,45.575 62.47,45.575 63.124,45.575 63.778,45.575 64.432,45.575 65.086,45.575 65.74,45.575 66.394,45.575 67.048,45.575 67.702,45.575 68.356,45.575 69.01,45.575 69.664,45.575 70.318,45.575 70.972,45.575 71.626,45.575 72.28,45.575 72.934,45.575 73.588,45.575 74.242,45.575 24.686,45.596 59.201,45.61 74.896,45.605 76.915,45.602 8.998,45.671 25.317,45.769 26.969,45.764 75.513,45.821 58.589,45.839 6.959,45.956 8.411,45.96 56.886,46.05 25.858,46.137 77.269,46.152 76.022,46.232 58.078,46.248 27.292,46.333 7.95,46.424 6.673,46.544 26.243,46.665 56.619,46.647 77.497,46.765 76.364,46.789 57.723,46.797 27.491,46.956 7.671,47.015 6.522,47.18 26.443,47.288 56.497,47.289 76.492,47.431 77.586,47.413 57.579,47.435 27.555,47.607 7.582,47.663 6.498,47.834 26.471,47.941 56.481,47.943 57.565,48.088 76.498,48.085 77.581,48.067 27.555,48.261 7.582,48.317 6.498,48.488 26.471,48.595 56.481,48.597 77.581,48.721 57.565,48.742 76.498,48.739 27.555,48.915 7.582,48.971 6.498,49.142 26.471,49.249 56.481,49.251 77.581,49.375 57.565,49.396 76.498,49.393 27.555,49.569 7.582,49.625 6.498,49.796 26.471,49.903 56.481,49.905 76.498,50.047 77.581,50.029 57.565,50.05 27.555,50.223 7.582,50.279 6.498,50.45 26.471,50.557 56.481,50.559 57.565,50.704 76.498,50.701 77.581,50.683 27.555,50.877 7.582,50.933 6.498,51.104 22.12,51.15 62.095,51.147 26.471,51.211 56.481,51.213 21.477,51.271 61.455,51.28 22.745,51.342 62.723,51.329 76.345,51.336 77.714,51.323 57.565,51.358 7.938,51.481 27.555,51.531 6.041,51.572 20.96,51.671 60.945,51.69 78.194,51.768 23.215,51.796 63.2,51.776 75.871,51.787 26.471,51.865 56.481,51.867 8.319,52.013 57.565,52.012 5.711,52.137 27.555,52.185 20.682,52.263 60.679,52.287 63.415,52.394 75.663,52.407 78.413,52.384 23.418,52.418 26.471,52.519 56.481,52.521 8.416,52.66 57.565,52.666 5.68,52.79 27.555,52.839 20.708,52.917 60.713,52.94 63.324,53.042 78.328,53.033 23.315,53.064 75.76,53.054 26.471,53.173 56.456,53.175 8.208,53.279 57.538,53.32 5.952,53.385 21.032,53.485 27.575,53.492 61.05,53.501 62.948,53.577 77.956,53.571 22.929,53.592 76.142,53.585 7.733,53.73 6.465,53.79 26.508,53.826 56.332,53.817 77.378,53.876 21.534,53.904 76.724,53.883 7.107,53.917 61.534,53.941 57.418,53.963 62.545,54.092 22.545,54.122 27.689,54.136 56.078,54.42 26.647,54.465 21.534,54.558 57.205,54.581 61.534,54.595 27.929,54.745 62.545,54.746 22.545,54.776 55.709,54.96 26.88,55.076 56.903,55.161 21.534,55.212 61.534,55.249 28.294,55.287 62.545,55.4 22.545,55.43 55.245,55.421 27.202,55.645 56.519,55.691 28.756,55.75 54.703,55.786 21.534,55.866 61.534,55.903 54.097,56.031 62.545,56.054 22.545,56.084 29.297,56.117 27.605,56.16 50.315,56.155 53.454,56.151 56.061,56.158 48.876,56.189 49.838,56.174 50.838,56.174 51.492,56.174 52.146,56.174 52.8,56.174 48.225,56.253 47.752,56.313 29.904,56.36 30.548,56.476 31.202,56.497 31.856,56.497 32.51,56.497 33.164,56.497 33.818,56.497 35.224,56.497 21.534,56.52 35.814,56.509 47.305,56.544 36.431,56.564 55.54,56.552 61.534,56.557 28.082,56.608 36.889,56.695 62.545,56.708 22.545,56.738 46.274,56.794 54.966,56.866 37.944,56.904 28.619,56.981 45.76,57.085 54.352,57.091 21.534,57.174 38.397,57.232 53.711,57.224 61.534,57.211 49.838,57.258 50.442,57.258 51.096,57.258 51.75,57.258 52.404,57.258 53.058,57.258 29.207,57.268 48.974,57.266 48.433,57.332 62.536,57.362 22.55,57.392 45.201,57.424 47.839,57.433 29.831,57.464 30.477,57.564 31.131,57.581 31.785,57.581 32.439,57.581 33.093,57.581 33.747,57.581 35.224,57.581 35.851,57.594 47.304,57.616 36.359,57.661 38.951,57.653 44.837,57.766 36.889,57.819 21.588,57.826 61.437,57.858 39.36,57.921 62.439,58.009 22.685,58.031 46.033,58.18 38.08,58.339 21.779,58.451 43.561,58.441 61.145,58.443 40.5,58.48 45.495,58.553 23.027,58.589 62.211,58.622 38.689,58.783 60.681,58.904 45.015,58.979 22.09,59.027 23.522,59.016 60.093,59.189 61.851,59.168 24.128,59.264 45.711,59.281 46.401,59.271 47.302,59.281 47.817,59.271 48.327,59.281 48.974,59.281 49.838,59.281 50.943,59.281 51.597,59.281 52.251,59.281 52.905,59.281 53.559,59.281 54.213,59.281 54.867,59.281 55.521,59.281 56.175,59.281 56.829,59.281 57.483,59.281 58.137,59.281 58.791,59.281 59.445,59.281 24.78,59.313 25.434,59.313 26.088,59.313 26.742,59.313 27.396,59.313 28.05,59.313 28.704,59.313 29.358,59.313 30.012,59.313 30.666,59.313 31.32,59.313 31.974,59.313 32.628,59.313 33.282,59.313 33.936,59.313 35.244,59.313 35.898,59.313 36.552,59.313 37.944,59.313 38.514,59.313 39.168,59.313 50.409,59.295 22.524,59.516 61.387,59.628 23.051,59.903 61.222,60.261 22.671,60.435 61.717,60.688 36.645,60.736 45.688,60.733 46.274,60.733 47.301,60.733 47.806,60.735 48.304,60.733 48.958,60.733 49.838,60.733 50.315,60.733 50.92,60.733 51.574,60.733 52.228,60.733 52.882,60.733 53.536,60.733 54.19,60.733 54.844,60.733 55.498,60.733 56.152,60.733 56.806,60.733 57.46,60.733 58.114,60.733 58.768,60.733 59.422,60.733 25.022,60.764 25.676,60.764 26.33,60.764 26.984,60.764 27.638,60.764 28.292,60.764 28.946,60.764 29.6,60.764 30.254,60.764 30.908,60.764 31.562,60.764 32.216,60.764 32.87,60.764 33.524,60.764 34.178,60.764 38.102,60.764 38.756,60.764 24.368,60.779 35.978,60.772 35.327,60.807 39.476,60.803 60.07,60.817 22.209,60.898 23.736,60.947 45.015,60.983 60.663,61.094 62.108,61.213 38.977,61.226 23.192,61.31 45.461,61.402 21.853,61.447 43.447,61.542 61.13,61.552 43.92,61.568 38.451,61.615 40.314,61.716 62.386,61.805 22.795,61.829 46.145,61.838 37.944,61.921 21.634,62.063 61.43,62.133 47.3,62.195 39.468,62.227 30.724,62.264 36.609,62.24 31.378,62.267 32.032,62.267 32.686,62.267 33.34,62.267 33.994,62.267 35.302,62.267 35.956,62.267 48.68,62.28 48.051,62.297 49.851,62.313 50.505,62.313 51.159,62.313 51.813,62.313 52.467,62.313 53.121,62.313 30.072,62.325 53.775,62.332 54.42,62.44 22.574,62.445 45.076,62.456 62.52,62.445 29.438,62.482 39.051,62.526 55.04,62.646 21.541,62.71 28.836,62.737 45.645,62.779 61.534,62.779 38.477,62.839 55.623,62.944 46.245,63.039 28.275,63.074 22.545,63.098 37.944,63.08 62.545,63.098 47.654,63.314 56.152,63.327 31.357,63.351 32.011,63.351 32.665,63.351 33.319,63.351 33.973,63.351 35.281,63.351 35.935,63.351 36.589,63.334 21.534,63.364 30.703,63.359 49.838,63.397 51.434,63.397 52.088,63.397 52.742,63.397 53.396,63.396 48.866,63.432 50.298,63.408 50.815,63.408 30.055,63.45 48.255,63.452 61.534,63.433 54.046,63.472 27.775,63.495 29.437,63.662 54.669,63.672 22.545,63.752 62.545,63.752 56.617,63.787 27.343,63.986 55.241,63.989 28.872,63.992 21.534,64.018 61.534,64.087 57.006,64.313 22.545,64.406 62.545,64.406 28.392,64.436 55.728,64.425 26.989,64.536 21.534,64.672 61.534,64.741 57.307,64.894 56.118,64.95 28.006,64.964 22.545,65.06 62.545,65.06 26.721,65.133 21.534,65.326 61.534,65.395 57.467,65.528 27.727,65.556 56.361,65.557 22.545,65.714 62.545,65.714 26.546,65.763 21.534,65.98 61.534,66.049 6.965,66.149 76.871,66.162 27.578,66.193 57.55,66.176 56.46,66.204 77.52,66.237 7.607,66.273 6.339,66.339 22.74,66.339 62.74,66.339 76.258,66.391 26.467,66.412 21.127,66.492 61.086,66.526 78.064,66.599 8.123,66.675 5.867,66.792 23.212,66.791 63.212,66.791 57.565,66.83 27.545,66.846 56.481,66.857 75.819,66.875 20.753,67.029 26.461,67.066 60.733,67.076 78.376,67.174 8.398,67.268 5.662,67.413 23.417,67.412 63.417,67.412 57.565,67.484 27.545,67.5 56.481,67.511 75.655,67.509 20.665,67.677 26.461,67.72 60.672,67.728 78.394,67.828 8.37,67.922 5.762,68.059 23.317,68.059 63.317,68.059 27.545,68.154 57.565,68.138 75.799,68.146 56.481,68.165 20.882,68.294 60.914,68.335 26.461,68.374 78.104,68.414 8.043,68.489 6.146,68.588 22.933,68.588 62.933,68.588 76.221,68.646 21.361,68.74 61.406,68.766 27.545,68.808 57.565,68.792 77.582,68.808 56.481,68.819 22.35,68.885 62.35,68.885 7.582,68.952 26.461,69.028 6.498,69.14 76.498,69.238 57.565,69.446 27.545,69.462 56.481,69.473 77.582,69.462 7.582,69.606 26.461,69.682 6.498,69.794 76.498,69.892 57.565,70.1 27.545,70.116 56.481,70.127 77.582,70.116 7.582,70.26 26.461,70.336 6.498,70.448 76.498,70.546 27.545,70.77 57.565,70.754 77.582,70.77 56.481,70.781 7.582,70.914 26.461,70.99 6.498,71.102 76.498,71.2 27.545,71.424 57.565,71.408 77.582,71.424 56.481,71.435 7.582,71.568 26.461,71.644 6.498,71.756 76.498,71.854 57.565,72.062 27.545,72.078 56.481,72.089 77.582,72.078 7.582,72.222 26.461,72.298 6.498,72.41 76.496,72.508 57.587,72.716 27.533,72.732 56.494,72.743 77.569,72.732 7.619,72.874 26.402,72.95 6.55,73.062 76.378,73.152 57.764,73.345 27.417,73.375 56.611,73.387 77.454,73.375 7.855,73.484 26.151,73.553 6.742,73.687 76.061,73.724 58.133,73.885 8.27,73.99 27.164,73.978 56.868,73.988 77.2,73.978 25.713,74.039 75.582,74.169 7.053,74.262 58.664,74.267 8.822,74.341 25.145,74.364 74.98,74.425 9.461,74.479 59.288,74.464 10.115,74.491 10.769,74.491 11.423,74.491 12.077,74.491 12.731,74.491 13.385,74.491 14.039,74.491 14.693,74.491 15.347,74.491 16.001,74.491 16.655,74.491 17.309,74.491 17.963,74.491 18.617,74.491 19.271,74.491 19.925,74.491 20.579,74.491 21.233,74.491 21.887,74.491 22.541,74.491 23.195,74.491 23.849,74.491 24.503,74.487 59.942,74.491 60.596,74.491 61.25,74.491 61.904,74.491 62.558,74.491 63.212,74.491 63.866,74.491 64.52,74.491 65.174,74.491 65.828,74.491 66.482,74.491 67.136,74.491 67.79,74.491 68.444,74.491 69.098,74.491 69.752,74.491 70.406,74.491 71.06,74.491 71.714,74.491 72.368,74.491 73.022,74.491 73.676,74.491 74.33,74.491 26.787,74.513 57.247,74.521 76.823,74.513 7.485,74.753 26.312,74.962 76.349,74.962 57.723,74.97 8.011,75.142 25.748,75.293 75.784,75.293 58.289,75.297 8.603,75.42 25.127,75.5 58.91,75.502 75.164,75.5 9.243,75.555 9.897,75.575 10.551,75.575 11.205,75.575 11.859,75.575 12.513,75.575 13.167,75.575 13.821,75.575 14.475,75.575 15.129,75.575 15.783,75.575 16.437,75.575 17.091,75.575 17.745,75.575 18.399,75.575 19.053,75.575 19.707,75.575 20.361,75.575 21.015,75.575 21.669,75.575 22.323,75.575 22.977,75.575 23.631,75.575 24.478,75.577 59.559,75.579 60.213,75.575 60.867,75.575 61.521,75.575 62.175,75.575 62.829,75.575 63.483,75.575 64.137,75.575 64.791,75.575 65.445,75.575 66.099,75.575 66.753,75.575 67.407,75.575 68.061,75.575 68.715,75.575 69.369,75.575 70.023,75.575 70.677,75.575 71.331,75.575 71.985,75.575 72.639,75.575 73.293,75.575 73.947,75.575 74.514,75.577
NetS9_5: pad.2 pad.3 S9.5 S10.5 | length 202.8
  Top Layer w0.315: S9.5 13.4,37.531 13.558,37.531 ccw(c13.558,38.697) 14.723,38.697 14.723,41.398 cw(c15.889,41.398) 17.054,41.398 17.054,33.665 ccw(c18.22,33.665) 19.385,33.665 19.385,41.398 cw(c20.551,41.398) 21.716,41.398 21.716,33.665 ccw(c22.882,33.665) 24.047,33.665 24.047,41.398 cw(c25.213,41.398) 26.378,41.398 26.378,33.665 ccw(c27.544,33.665) 28.709,33.665 28.709,41.398 cw(c29.875,41.398) 31.04,41.398 31.04,33.665 ccw(c32.206,33.665) 33.371,33.665 33.371,36.366 cw(c34.537,36.366) 34.537,37.531 36.504,37.531 pad.2@40.984,37.531 ; pad.3@42.164,37.533 47.4,37.533 49.82,37.533 49.978,37.533 ccw(c49.978,38.698) 51.143,38.698 51.143,41.399 cw(c52.309,41.399) 53.474,41.399 53.474,33.666 ccw(c54.64,33.666) 55.805,33.666 55.805,41.399 cw(c56.971,41.399) 58.136,41.399 58.136,33.666 ccw(c59.302,33.666) 60.467,33.666 60.467,41.399 cw(c61.633,41.399) 62.798,41.399 62.798,33.666 ccw(c63.964,33.666) 65.129,33.666 65.129,41.399 cw(c66.295,41.399) 67.46,41.399 67.46,38.698 ccw(c68.626,38.698) 68.626,37.533 69.96,37.533 S10.5
RF1: S1.5 U1.1 | length 49.8
  Top Layer w0.315: S1.5 7.04,72.493 cw(c9.58,72.493) 9.58,75.033 9.592,75.033 24.463,75.033 cw(c24.463,72.493) 27.003,72.493 27.003,66.619 ccw(c30.813,66.619) 30.813,62.809 36.198,62.809 cw(c36.198,57.998) 39.6,61.4 ccw(c40.465,62.265) 40.465,61.042 U1.1@40.496,61.042
RF1_N: Diff1_N.5 U1.4 | length 24.7
  Top Layer w0.23: Diff1_N.5 22.039,57.278 cw(c24.579,57.278) 24.579,59.818 40.143,59.818 cw(c40.163,59.818) 40.163,59.838 U1.4@40.508,59.838
RF1_P: Diff1_P.5 U1.3 | length 24.7
  Top Layer w0.23: Diff1_P.5 22.04,62.798 ccw(c24.58,62.798) 24.58,60.258 40.143,60.258 ccw(c40.163,60.258) 40.163,60.238 U1.3@40.508,60.238
RF2: S4.5 U1.6 | length 49.7
  Top Layer w0.315: S4.5 7.04,47.573 ccw(c9.58,47.573) 9.58,45.033 9.679,45.033 24.473,45.033 ccw(c24.473,47.573) 27.013,47.573 27.013,53.233 cw(c30.819,53.233) 30.819,57.039 35.531,57.039 ccw(c35.531,62.369) 37.856,57.573 ccw(c37.72,57.857) 37.875,57.582 38.425,57.894 ccw(c38.27,58.168) 38.443,57.905 ccw(c35.531,62.369) 39.3,58.6 cw(c40.318,57.582) 40.318,59.022 U1.6@40.497,59.022
RF2_N: Diff2_N.5 U1.15 | length 24.7
  Top Layer w0.23: U1.15@43.495,59.807 43.84,59.807 cw(c43.84,59.787) 43.86,59.787 59.5,59.787 cw(c59.5,57.247) 62.04,57.247 Diff2_N.5
RF2_P: Diff2_P.5 U1.16 | length 24.8
  Top Layer w0.23: U1.16@43.495,60.207 43.84,60.207 ccw(c43.84,60.227) 43.86,60.227 59.5,60.227 ccw(c59.5,62.767) 62.04,62.767 Diff2_P.5
RF3: S5.5 U1.13 | length 49.5
  Top Layer w0.315: U1.13@43.488,58.983 43.817,58.983 cw(c43.817,58.017) 44.5,58.7 ccw(c49.29,63.49) 45.79,57.69 45.791,57.689 ccw(c45.953,57.96) 45.812,57.678 46.43,57.369 ccw(c46.571,57.65) 46.434,57.367 ccw(c49.29,63.307) 49.29,56.716 49.292,56.716 53.148,56.716 cw(c53.148,52.841) 57.023,52.841 57.023,47.573 ccw(c59.563,47.573) 59.563,45.033 74.595,45.033 ccw(c74.595,47.477) 77.039,47.477 S5.5
RF3_N: De-embedding.5 for.5 pad.4@42.519,14.838 pad.5 | length 102.4
  Top Layer w0.23: for.5 22.04,12.273 cw(c24.58,12.273) 24.58,14.813 27.589,14.813 27.924,14.813 ccw(c27.924,16.376) 29.487,16.376 29.487,18.722 cw(c30.61,18.722) 31.733,18.722 31.733,11.344 ccw(c33.296,11.344) 34.859,11.344 34.859,18.722 cw(c35.982,18.722) 37.105,18.722 37.105,16.376 ccw(c38.668,16.376) 38.668,14.813 41.227,14.813 41.233,14.807 41.261,14.807 41.261,14.813 pad.5@41.407,14.813 ; pad.4@42.519,14.813 44.534,14.813 44.869,14.813 ccw(c44.869,16.376) 46.432,16.376 46.432,18.722 cw(c47.555,18.722) 47.555,19.845 cw(c47.555,18.722) 48.678,18.722 48.678,11.344 ccw(c50.241,11.344) 50.241,9.781 ccw(c50.241,11.344) 51.804,11.344 51.804,18.722 cw(c52.927,18.722) 52.927,19.845 cw(c52.927,18.722) 54.05,18.722 54.05,16.376 ccw(c55.613,16.376) 55.613,14.813 57.334,14.813 59.5,14.813 cw(c59.5,12.273) 62.04,12.273 De-embedding.5
RF3_P: Diff3.5 pad.4@41.422,15.241 pad.4@42.508,15.238 | length 102.5
  Top Layer w0.23: Diff3.5@22.04,22.533 22.04,17.793 ccw(c24.58,17.793) 24.58,15.253 27.589,15.253 27.924,15.253 ccw(c27.924,16.376) 29.047,16.376 29.047,18.722 cw(c30.61,18.722) 32.173,18.722 32.173,11.344 ccw(c33.296,11.344) 34.419,11.344 34.419,18.722 cw(c35.982,18.722) 37.545,18.722 37.545,16.376 ccw(c38.668,16.376) 38.668,15.253 41.261,15.253 41.422,15.253 pad.4@41.422,15.241 ; pad.4@42.508,15.253 44.534,15.253 44.869,15.253 ccw(c44.869,16.376) 45.992,16.376 45.992,18.722 cw(c47.555,18.722) 47.555,20.285 cw(c47.555,18.722) 49.118,18.722 49.118,11.344 ccw(c50.241,11.344) 50.241,10.221 ccw(c50.241,11.344) 51.364,11.344 51.364,18.722 cw(c52.927,18.722) 52.927,20.285 cw(c52.927,18.722) 54.49,18.722 54.49,16.376 ccw(c55.613,16.376) 55.613,15.253 57.334,15.253 59.5,15.253 ccw(c59.5,17.793) 62.04,17.793 Diff3.5@62.04,22.533
RF4: S8.5 U1.18 | length 50
  Top Layer w0.315: U1.18@43.466,61.007 43.793,61.007 ccw(c43.793,62.069) 44.543,61.317 cw(c48.287,57.575) 45.22,61.89 cw(c49.06,56.489) 46.166,62.45 cw(c48.253,57.265) 46.177,62.455 cw(c48.253,57.265) 48.253,62.855 53.389,62.855 ccw(c53.397,66.576) 56.772,65.008 ccw(c56.485,65.139) 56.784,65.04 ccw(c52.303,66.523) 57.023,66.523 57.023,72.493 cw(c59.563,72.493) 59.563,75.033 74.5,75.033 cw(c74.5,72.493) 77.04,72.493 S8.5

## Polygon pours and split planes (outlines as drawn)
GND on Layer2 "GND_L02_P006" (solid, pour order 6): 0,0.1 0,100.1 84,100.1 84,0.1
GND on Layer3 "GND_L03_P003" (solid, pour order 3): 0,0 0,100 84,100 84,0
GND on Top Layer "GND_L01_P002" (solid, pour order 2): 0,0 0,100 84,100 84,0
GND on Bottom Layer "GND_L04_P000" (solid, pour order 0): 0,0 0,100 84,100 84,0

## Silkscreen, mask and mechanical layers (free items; w line width, h text height)
Top Overlay:
  drawing of 25 lines, arcs and shapes, not listed
  text "DC" at 30.5,89.4 h1.8
  text "0" at 43.859,46.452 h3
Mechanical 1:
  the board outline again, w0.254
Bottom Wire Bonding:
  drawing of 9 lines, arcs and shapes, not listed
Top Wire Bonding:
  lines w0.025 net NetS9_5: 41.186,37.525 42.04,37.533
  lines w0.025 net RF3_N: 41.536,14.83 42.377,14.83
  lines w0.025 net RF3_P: 41.551,15.227 42.375,15.223